# Altium PCB CAN_24bit_airspeed.PcbDoc
Units mm, origin at the board's own origin, x right, y up, seen from the top; angles counter-clockwise.
Board outline 38.41 x 12.98 mm, 4 copper layers (Component Side, Signal Layer Top, Signal Layer Bottom, Solder Side), stack 1.581 mm thick; 31 components, 33 nets, 144 pads, 54 vias.
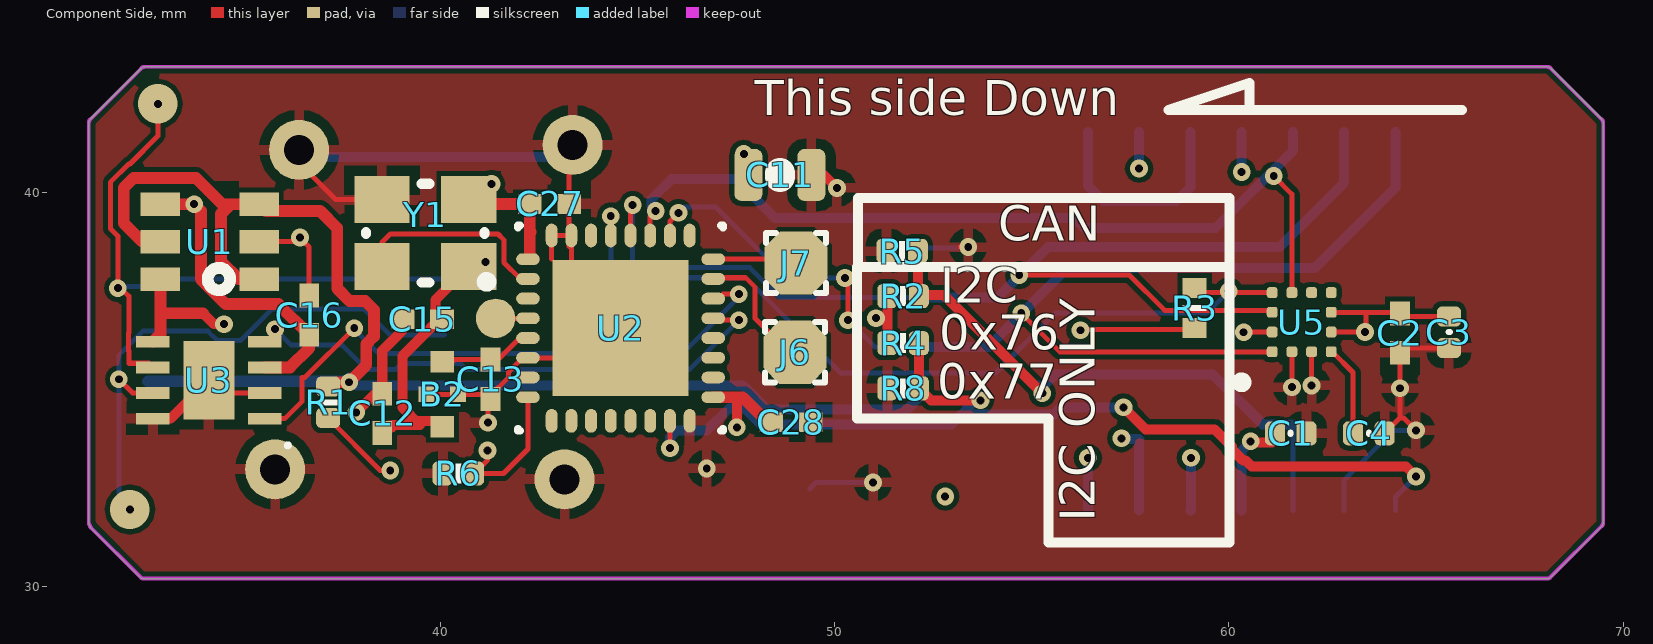
[diagram p0: Component Side view]
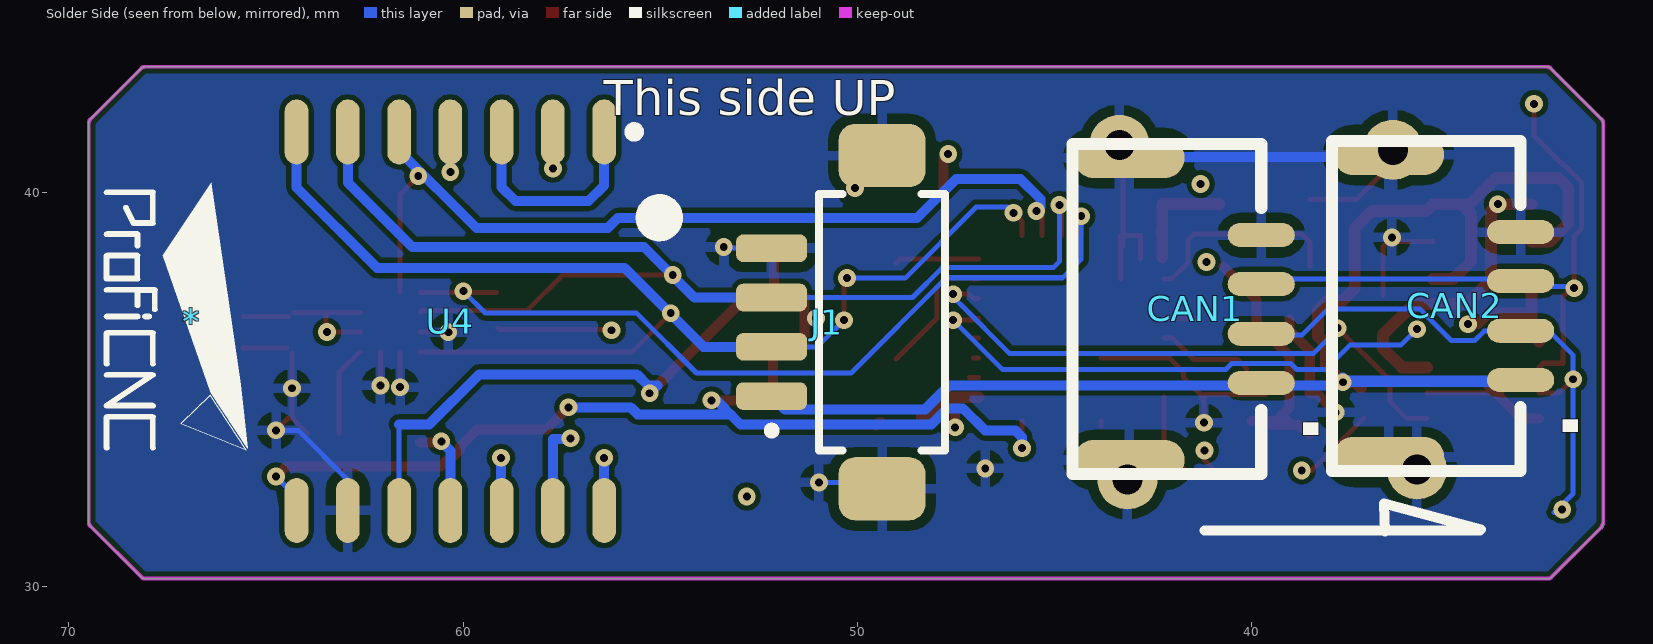
[diagram p1: Solder Side view, seen from below]
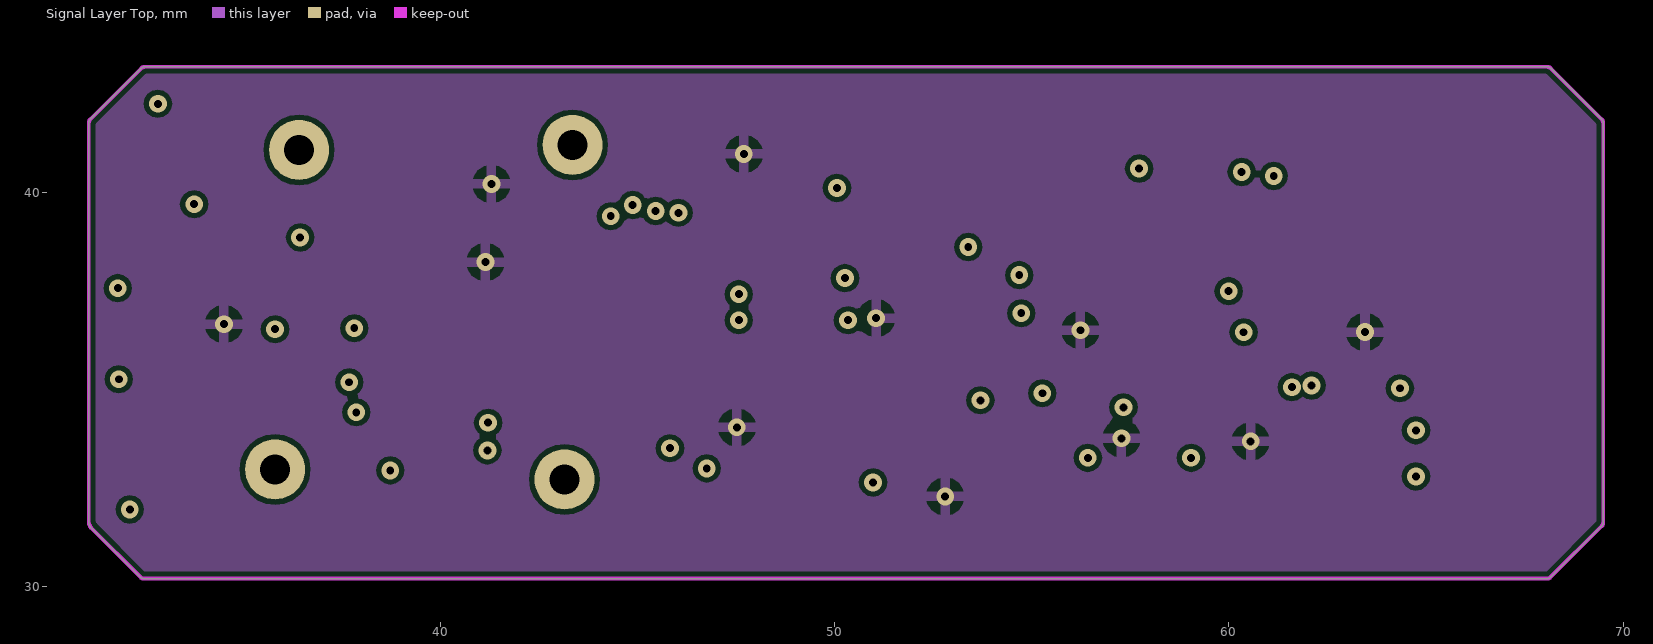
[diagram p2: Signal Layer Top]
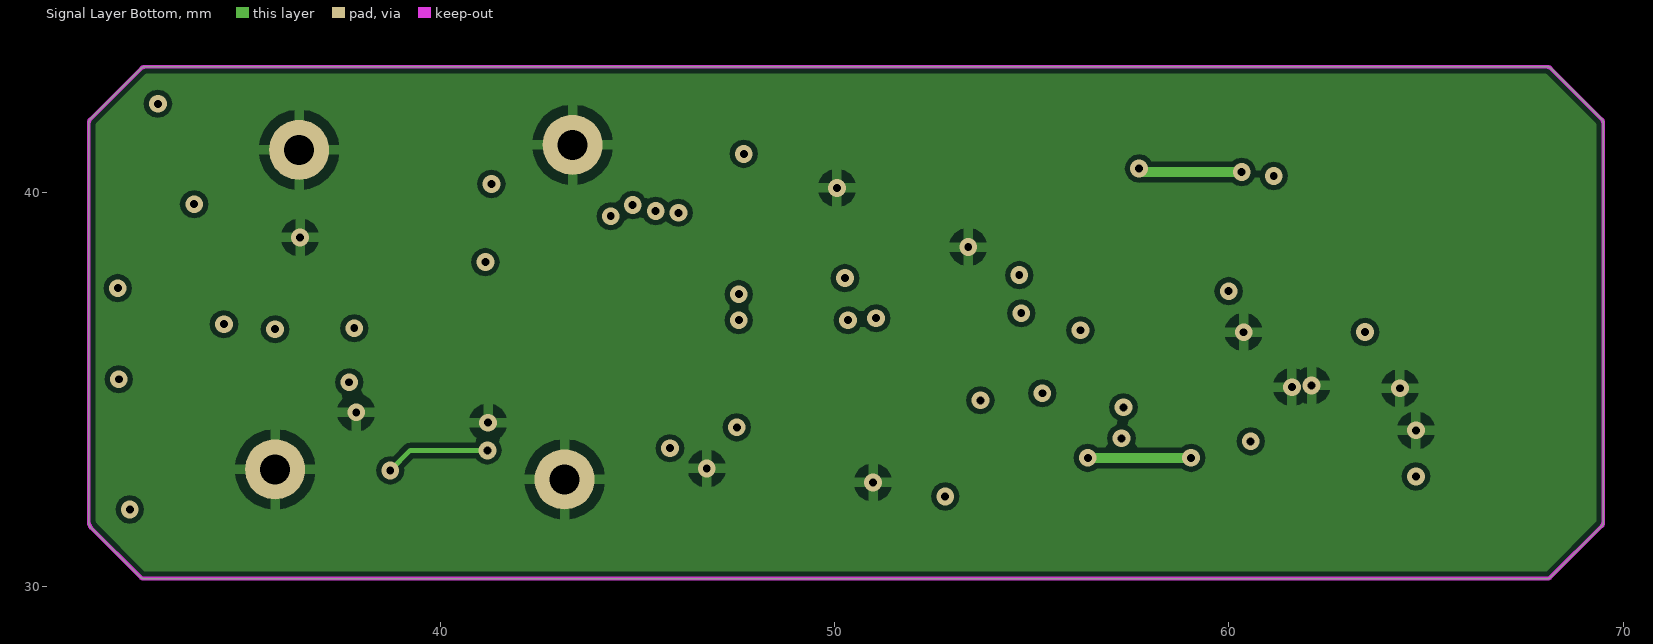
[diagram p3: Signal Layer Bottom]
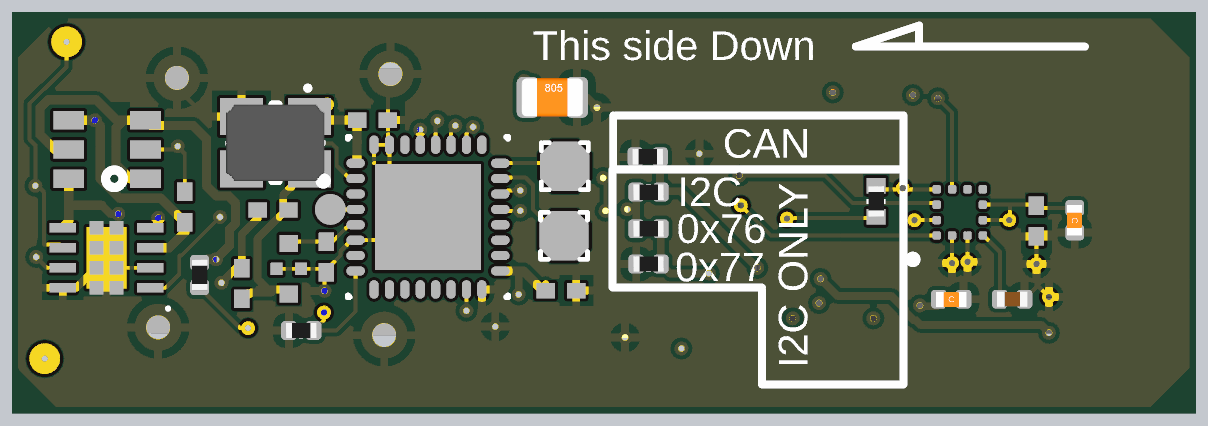
[diagram p4: 3D render of the assembled board from above, using the file's embedded part models]
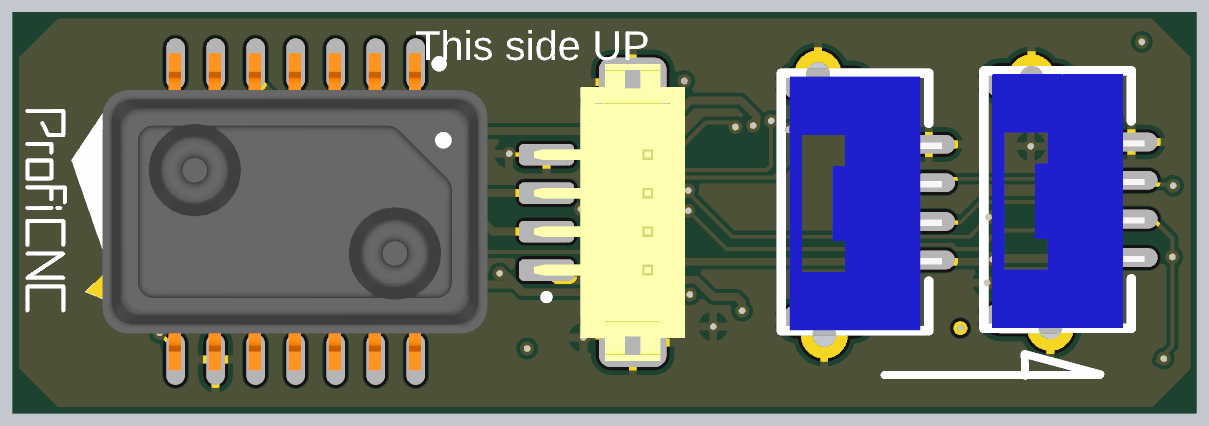
[diagram p5: 3D render of the assembled board from below, using the file's embedded part models]

## Layer stack, top to bottom
Component Side: signal copper 0.0711
Dielectric: prepreg 0.2311, Dk 4.2
Signal Layer Top: signal copper 0.0356
Dielectric: core 0.905, FR-4, Dk 4.2
Signal Layer Bottom: signal copper 0.0356
Dielectric: prepreg 0.2311, Dk 4.2
Solder Side: signal copper 0.0711

## Board outline
31.152,31.482 cw(c31.242,31.572) 31.118,31.542 cw(c31.217,31.623) 31.089,31.623 31.089,41.758 cw(c31.217,41.758) 31.127,41.848 32.422,43.143 32.421,43.143 cw(c32.512,43.053) 32.512,43.18 68.072,43.18 cw(c68.072,43.053) 68.163,43.143 68.162,43.143 69.457,41.848 cw(c69.367,41.758) 69.495,41.758 69.495,31.623 cw(c69.367,31.623) 69.457,31.532 69.457,31.533 68.162,30.238 68.163,30.238 cw(c68.072,30.328) 68.072,30.2 32.487,30.2 cw(c32.487,30.328) 32.396,30.238 32.397,30.238

## Design rules (kind name [scope] priority, off if disabled: settings)
Clearance [All] p1: gap=0.127
ComponentClearance E22-6 [HasFootprint('ProfiCNC_medium')  or HasFootprint('E22-6')] p1: gap=0 collisioncheckmode=3 verticalgap=0 showdistances=FALSE
ComponentClearance [All] p2: gap=0.254 collisioncheckmode=3 verticalgap=0.254 showdistances=FALSE
NetAntennae current_sense [InNet('SERVO_RAIL_SUP')] p1: netantennaetolerance=30
NetAntennae [All] p2: netantennaetolerance=0
PolygonConnect DIRECT [(HasFootprint('MOTOR_PAD') OR HasFootprint('CAPC5750L') OR HasFootprint('Q5B') OR HasFootprint('BAT_PAD')OR HasFootprint('4RESC5125X09N')OR HasFootprint('E22-6'))] p1: connectstyle=Direct reliefconductorwidth=0.254 reliefentries=4 polygonreliefangle="90 Angle" airgapwidth=0.254
PolygonConnect [All] p2: connectstyle=Relief reliefconductorwidth=0.254 reliefentries=4 polygonreliefangle="90 Angle" airgapwidth=0.254
RoutingVias [All] p1: holewidth=0.3 width=0.45 viastyle="Through Hole" minholewidth=0.2 minwidth=0.45 maxholewidth=0.711 maxwidth=1.27
ShortCircuit shunt [HasFootprint('4RESC5125X09N') vs InNetClass('All Nets')] p1: allowed=TRUE
ShortCircuit PCB_RESIST [InNet('SERVO_RAIL_SUP') vs InNet('SERVO_RAIL')] p2: allowed=TRUE
ShortCircuit [All] p3: allowed=FALSE
SolderMaskExpansion [All] p1: expansion=0.102
Width [All] p1: maxlimit=2 minlimit=0.127 preferedwidth=0.254
25 further rules are at their usual default settings.

## Components (designator, comment, footprint, x,y, rotation, side; value= is the part's Value field where it differs from the comment)
* "ProfiCNC_LOGO" PROFICNC_MEDIUM 66.878,36.728 r270 bottom
B2 "Filter" NFM18CC 40.056,34.874 r90 top
C1 "CAP" C0402#1 61.57,33.884 r0 top
C2 "Cap" CAPC1005L 64.338,36.424 r270 top (schematic designator C27)
C3 "0u1" C0402#2 65.583,36.449 r270 top (schematic designator C1)
C4 "0u1" C0402#2 63.551,33.884 r0 top
C11 "CAP" C0805 48.616,40.437 r0 top
C12 "CAP CER 10000PF 50V X7R 0402" CAPC1005L 38.532,34.392 r270 top
C13 "CAP CER 10000PF 50V X7R 0402" CAPC1005L 41.275,35.255 r90 top
C15 "CAP CER 10000PF 50V X7R 0402" CAPC1005L 39.548,36.779 r0 top
C16 "Cap" CAPC1005L 36.678,36.881 r270 top
C27 "Cap" CAPC1005L 42.774,39.7 r0 top
C28 "CAP CER 10000PF 50V X7R 0402" CAPC1005L 48.895,34.163 r180 top
CAN1 "BM04B-GHS-TBT" BM04-GHS-TBT 45.212,37.033 r90 bottom
CAN2 "BM04B-GHS-TBT" BM04-GHS-TBT 38.633,37.109 r90 bottom
J1 "HDR_TAB_1x4" DF13C-4P-1.25V 49.378,36.703 r270 bottom
J6 "1.6mm Pad / 0.9mm Hole" "1.6mm Pad / 0.9mm Hole" 48.997,35.941 r0 top
J7 "1.6mm Pad / 0.9mm Hole" "1.6mm Pad / 0.9mm Hole" 49.022,38.202 r0 top
R1 "RES" R0402#1 37.16,34.671 r270 top
R2 "RES" R0402#1 51.74,37.363 r0 top
R3 "RES" R0402#2 59.131,37.059 r90 top
R4 "RES" R0402#1 51.74,36.17 r0 top
R5 "RES" R0402#1 51.714,38.506 r180 top
R6 "RES" R0402#1 40.462,32.868 r180 top
R8 "RES" R0402#1 51.74,35.027 r180 top
U1 "MIC5211" SOT23-6 34.138,38.811 r180 top
U2 "IC MCU M4 64KB FLASH 32UFQFPN" QFN50P500X500X60-32L 44.577,36.551 r0 top
U3 "CAN" SON65P300X100_HS-9N 34.138,35.23 r180 top
U4 "MS5525DSO-DP" MS5525DSO 60.325,36.728 r270 bottom
U5 "LIS3MDL" LIS3MDL 61.849,36.703 r90 top
Y1 "Oscillator" CS325 39.624,38.964 r180 top

## Footprints (in the part's own frame and the unit in brackets; to place one, negate y for a bottom-side part, rotate by r counter-clockwise, add the part's x,y. Pads: shape width x height; smd on the part's side, far side on the other; paste and mask are expansions set on the pad)
"1.6mm Pad / 0.9mm Hole" [mil]
  oct 63x63 smd: 1(0,0)
  silkscreen extent -30,-30 30,30
BM04-GHS-TBT [mil] "BM04-GHS-TBT"
  rrect100% 24x67 smd: 1(-73.82,-214.57) 2(-24.61,-214.57) 3(25,-214.57) 4(74,-214.57)
  rrect100% 40x111 smd: GND(-150.59,-82.68) GND(151,-82.68)
  silkscreen extent -164,-215 165,-26, body extent -164,-231 161,-37, height 168
C0402#1 [mil]
  rrect50% 20x24 smd mask+0: 1(-15.75,0) 2(15.75,0)
  silkscreen extent 0,0 0,1, body extent -20,-10 20,9, height 19
C0402#2 [mil]
  rrect50% 20x24 smd mask+0: P$1(-15.75,0) P$2(15.75,0)
  silkscreen extent 0,0 0,1, body extent -20,-10 20,9, height 19
C0805 [mil]
  rrect50% 28x52 smd mask+0: 1(-31.5,0) 2(31.5,0)
  silkscreen extent 0,-2 0,2, body extent -39,-25 39,25, height 31
CAPC1005L [mm] "Chip Capacitor, Body 1.0x0.5mm, IPC High Density"
  rect 0.6x0.5 smd: 1(-0.5,0) 2(0.5,0)
  body extent -0.55,-0.3 0.55,0.3, height 0.6
CS325 [mm] "3.2mm x 2.5mm Oscillator"
  rect 1.4x1.2 smd: 1(-1.1,-0.85) 2(1.1,-0.85) 3(1.1,0.85) 4(-1.1,0.85)
  round 0.3 on Top Overlay: ""(-1.05,-1.775)
  silkscreen extent -1.5,-1.25 1.5,1.25, body extent -1.6,-1.24 1.6,1.24, height 0.99
DF13C-4P-1.25V [mm]
  rrect50% 0.7x1.8 smd: 1(1.875,-2.8) 2(0.625,-2.8) 3(-0.625,-2.8) 4(-1.875,-2.8)
  rrect50% 1.6x2.2 smd: tab(-4.225,0) tab(4.225,0)
  silkscreen extent -3.25,-2.9 3.25,1.6, body extent -4.82,-3.2 4.83,1.7, height 4.8
LIS3MDL [mm] "VFLGA-12"
  rrect50% 0.275x0.275 smd: 1(-0.75,0.75) 2(-0.75,0.25) 3(-0.75,-0.25) 4(-0.75,-0.75) 5(-0.25,-0.75) 6(0.25,-0.75) 7(0.75,-0.75) 8(0.75,-0.25) 9(0.75,0.25) 10(0.75,0.75) 11(0.25,0.75) 12(-0.25,0.75)
  silkscreen extent -1.65,1.4 -1.4,1.65, body extent -1.07,-1.07 1.07,1.07, height 0.79
MS5525DSO [mm] "MS5525DSO Differential preassure sensor"
  oval 1.65x0.6 smd: 1(-4.8,3.9) 2(-4.8,2.6) 3(-4.8,1.3) 4(-4.8,0) 5(-4.8,-1.3) 6(-4.8,-2.6) 7(-4.8,-3.9) 8(4.8,-3.9) 9(4.8,-2.6) 10(4.8,-1.3) 11(4.8,0) 12(4.8,1.3) 13(4.8,2.6) 14(4.8,3.9)
  silkscreen extent -4.92,4.53 -2.33,5.6, body extent -5.14,-6.28 5.16,6.22, height 9.7
NFM18CC [mm] "Chip Capacitor, 3-Leads, Body 1.6x0.8mm"
  rect 0.55x0.6 smd: 1(-0.825,0) 3(0.825,0)
  rect 0.4x0.4 smd: 2(0,0.4) 2(0,-0.4)
  body extent -0.85,-0.45 0.85,0.45, height 0.7
PROFICNC_MEDIUM [mm] "ProfiCNC_medium"
  silkscreen extent -3.5,-2.23 3.28,1.41
QFN50P500X500X60-32L [mm] "QFN, 32-Leads, Body 5.2x5.2mm (max), Pitch 0.50mm, IPC High Density"
  oval 0.6x0.3 smd: 1(-2.35,1.75) 2(-2.35,1.25) 3(-2.35,0.75) 4(-2.35,0.25) 5(-2.35,-0.25) 6(-2.35,-0.75) 7(-2.35,-1.25) 8(-2.35,-1.75) 17(2.35,-1.75) 18(2.35,-1.25) 19(2.35,-0.75) 20(2.35,-0.25) 21(2.35,0.25) 22(2.35,0.75) 23(2.35,1.25) 24(2.35,1.75)
  oval 0.3x0.6 smd: 9(-1.75,-2.35) 10(-1.25,-2.35) 11(-0.75,-2.35) 12(-0.25,-2.35) 13(0.25,-2.35) 14(0.75,-2.35) 15(1.25,-2.35) 16(1.75,-2.35) 25(1.75,2.35) 26(1.25,2.35) 27(0.75,2.35) 28(0.25,2.35) 29(-0.25,2.35) 30(-0.75,2.35) 31(-1.25,2.35) 32(-1.75,2.35)
  rect 3.45x3.45 smd: 33(0,0)
  silkscreen extent -3.52,-2.6 2.6,2.6, body extent -2.58,-2.57 2.57,2.58, height 0.6
R0402#1 [mil]
  rrect50% 20x24 smd mask+0: 1(-15.75,0) 2(15.75,0)
  silkscreen extent -3,-10 3,10, body extent -20,-10 20,10, height 12
R0402#2 [mil]
  rect 20x24 smd: 1(-19.68,0) 2(20,0)
  silkscreen extent -3,-12 3,12, body extent -20,-10 20,10, height 12
SON65P300X100_HS-9N [mm] "SON, 8-Leads, Body 3.00x3.00mm, Pitch 0.65mm, Thermal Pad 2.40x1.59mm, IPC Medium Density"
  rect 0.85x0.3 smd: 1(-1.42,0.975) 2(-1.42,0.325) 3(-1.42,-0.325) 4(-1.42,-0.975) 5(1.42,-0.975) 6(1.42,-0.325) 7(1.42,0.325) 8(1.42,0.975)
  rect 1.3x2 smd paste-0.795: 2(0,0)
  silkscreen extent -2.05,1.6 -1.95,1.7, body extent -1.55,-1.55 1.55,1.55, height 1
SOT23-6 [mm]
  rect 1x0.6 smd: 1(-1.27,1.016) 2(-1.27,0.066) 3(-1.27,-0.884) 4(1.23,-0.884) 5(1.23,0.066) 6(1.23,1.016)
  Component Side pour cut-out: -0.77,1.616 -0.77,-1.484 0.73,-1.484 0.73,1.616
  silkscreen extent -0.54,0.73 0.03,1.3

## Part data
B2: library part NFM18CC222R1C3, "EMIFIL (Capacitor type) Single Circuit Type for Signal Lines"
C1: library part C01050, "CAP CER 0.1UF 16V X7R 0402"
C2 C16 C27: "CAP CER 1UF 6.3V X5R 0402"
C3 C4: library part CAP0402, "CAP CER 0.1UF 16V Y5V 0402"
C11: library part C01690, "CAP CER 22UF 6.3V X5R 0805"
C12 C13 C15 C28: library part Cap
J1: library part J00015, "CONN HEADER 4POS 1.25MM SMD GOLD"
J6 J7: library part "Connector 1x01"
R1: library part R00142, "RES SMD 10K OHM 1% 1/16W 0402"
R2 R3 R4 R5 R8: library part R00094, "RES SMD 0R 1% 1/16W 0402"
R6: library part R00094, "RES SMD 1K OHM 1% 1/16W 0402"
U2: library part STM32F302K8U6, "72 MHz Cortex-M4F MCU with 16 KB RAM, 64 KB flash"
Y1: library part ASE-12.000MHZ, "3.3V 8MHz XO Oscillator"

## Free pads (board coordinates)
  round 1.524 hole 0.762: 0(36.424,41.072) 1(35.814,32.969) 2(43.155,32.715) 3(43.358,41.199)
  round 1 smd: 4(41.406,36.801)

## Via types
v1: diameter 0.45, hole 0.2, Component Side to Solder Side, tented both sides, 41 vias
v2: diameter 0.45, hole 0.2, Component Side to Solder Side, 11 vias
v3: diameter 1/0.45/0.45/0.45 (per signal layer), hole 0.2, Component Side to Solder Side, tented bottom, 2 vias

## Nets (pads, with @x,y where several pads share a name; then routed paths per layer and width w, separated by ;. In a path a pad name is that pad's centre, name@x,y a point inside that pad or via, vN(x,y) a via of type N, cw(c..) or ccw(c..) an arc to the next point about the centre after c; other vN are vias at no path point)
3V3_MCU: B2.1 C1.1 C2.1 C3.P$1 C11.1 C12.2 C15.2 C27.1 C28.2 R2.1 R3.1 R4.1 U1.6 U2.1 U2.17 U3.5 U4.11 U4.13 U5.5 U5.6 Y1.1 Y1.4 | length 30
  Component Side w0.127: v2(56.236,36.5) 56.252,36.516 59.089,36.516 R3.1 ; U5.5 v2(63.453,36.453) ; U5.6 63.475,36.953 ; v2@63.475,36.474 63.475,36.953 ; C2.1@64.309,36.953 63.475,36.953 ; C2.1@64.413,36.849 C3.P$1
  Component Side w0.254: 33.985,36.932 34.265,36.652 v1(34.519,36.652) ; C12.2@38.768,34.061 38.805,34.098 39.486,34.098 39.04,34.544 39.04,35.839 39.878,36.678 39.878,37.268 Y1.4 ; 39.085,34.202 B2.1@40.005,34.202 ; v1(47.523,34.036) 47.523,34.651 47.673,34.801 ; v1(47.701,40.97) 47.816,40.856 C11.1 C11.1@47.816,40.043 ; C28.2 C28.2@48.395,34.374 ; v1(51.054,36.805) 51.34,36.805 ; R4.1 51.34,36.805 ; R2.1 51.34,36.805 ; v1(60.554,33.68) 60.579,33.655 C1.1@61.093,33.655
  Component Side w0.3: U3.5 32.908,36.395 32.908,36.932 ; U1.6 32.908,36.932 ; 33.985,36.932 32.908,36.932 ; C12.2 38.702,34.061 C12.2@38.768,34.061 ; Y1.1@40.837,39.7 C27.1 42.274,39.006 42.291,38.989 42.274,38.989 U2.1@42.274,38.347 ; U2.17 47.673,34.801 C28.2@48.293,34.18
  Solder Side w0.254: v1(57.277,33.757) 57.293,33.74 57.725,33.74 U4.13 ; U4.11 60.325,33.452 v1(60.554,33.68)
  Solder Side w0.3: v1(41.148,38.227) v1@41.148,38.278
  other v1: 52.807,32.283 41.3,40.208
3V3A: B2.3 C13.2 U2.5 | length 2.4
  Component Side w0.127: B2.3@40.132,35.521 40.366,35.755 C13.2 41.47,35.755 42.016,36.301 U2.5
5V_MCU: C16.2 U1.4 U3.3 | length 7.8
  Component Side w0.3: U1.4 v1(33.762,39.695) 33.934,39.522 33.934,37.795 34.569,37.16 35.898,37.16 C16.2 36.678,36.043 36.19,35.555 U3.3
CAN_POWER_IN: CAN1.1 CAN2.1 J1.1 R1.1 U1.1 U1.3 U1.5 | length 37
  Component Side w0.3: U1.5 32.451,38.745 31.979,39.218 31.979,40.108 32.232,40.361 33.806,40.361 34.472,39.695 U1.3 ; U1.1 34.9,37.795 34.442,38.252 34.442,39.446 34.691,39.695 U1.3 ; R1.1@37.236,35.046 37.37,35.179 v1(37.694,35.179) 38.128,35.613 38.128,36.148 38.323,36.343 38.323,36.759 ; 38.323,36.703 38.323,37.014 38.1,37.237 37.709,37.237 37.389,37.557 37.389,39.091 36.957,39.522 35.58,39.522 U1.3
  Solder Side w0.254: v1@37.694,35.281 37.871,35.103 47.673,35.103 48.282,34.493 51.843,34.493 J1.1
  Solder Side w0.3: CAN2.1@32.588,35.204 37.694,35.204 v1@37.694,35.281
CAN_POWER_SENSE: R1.2 R6.1 U2.8 | length 8.5
  Component Side w0.127: R1.2 37.16,34.265 38.481,32.944 v2(38.735,32.944) ; v2(41.199,33.452) 41.199,33.204 R6.1 41.605,32.868 42.227,33.489 U2.8
  Signal Layer Bottom w0.127: v2(38.735,32.944) 39.243,33.452 v2(41.199,33.452)
CAN_RX: U2.21 U3.4 | length 13.6
  Component Side w0.127: U2.21 47.059,36.801 47.012,36.754 v1(47.574,36.754)
  Solder Side w0.127: v1(35.814,36.525) 36.22,36.119 37.516,36.119 38.125,35.509 38.866,35.509 39.011,35.653 40.513,35.653 40.658,35.509 46.33,35.509 v1(47.574,36.754)
CAN_TX: U2.22 U3.1 | length 14.9
  Component Side w0.127: U3.1 36.058,34.255 36.5,34.696 36.5,35.299 36.569,35.299 v1(37.821,36.551) ; U2.22 47.059,37.301 47.172,37.414 v1(47.574,37.414)
  Solder Side w0.127: v1@37.795,36.551 38.433,35.913 46.146,35.913 ; 46.148,35.916 47.402,37.169 47.406,37.169 v1@47.574,37.338
CANH: CAN1.2 CAN2.2 U3.7 | length 14.4
  Component Side w0.127: v1(31.852,35.255) 32.202,34.905 U3.7
  Solder Side w0.127: v3@32.334,31.877 31.852,32.36 v1(31.852,35.255) 31.852,35.865 32.461,36.474 34.109,36.474 34.346,36.237 34.941,36.237 35.398,36.694 35.398,36.697 35.743,37.042 38.065,37.042 38.735,36.373 CAN1.2@40.107,36.373
  other v3: 32.131,31.953
CANL: CAN1.3 CAN2.3 U3.6 | length 16.6
  Component Side w0.127: U3.6 32.611,35.662 32.106,35.662 32.106,35.972 32.102,35.976 32.102,36.434 32.106,36.437 32.106,37.363 31.902,37.567 v1(31.826,37.567) 31.826,38.888 31.638,39.077 31.638,40.249 32.106,40.716 32.136,40.716 32.842,41.423 v3@32.842,42.393
  Solder Side w0.127: v1@31.826,37.607 33.133,37.607 33.133,37.654 33.274,37.795 CAN1.3@40.183,37.795
  other v3: 32.842,42.24
CLK: U2.2 Y1.3 | length 5.2
  Component Side w0.127: Y1.3 38.524,38.727 38.735,38.938 41.469,38.938 41.615,38.793 41.615,38.218 42.032,37.801 U2.2
GND_MCU: B2.2 C1.2 C2.2 C3.P$2 C4.P$2 C11.2 C12.1 C13.1 C15.1 C16.1 C27.2 C28.1 CAN1.4 CAN1.GND CAN2.4 CAN2.GND J1.4 J1.tab pad.0 pad.1 pad.2 pad.3 R5.2 R6.2 R8.2 U1.2 U2.6 U2.16 U2.31 U2.32 U2.33 U3.2 U3.8 U4.9 U5.2 U5.3 U5.12 Y1.2 | length 41.2
  Component Side w0.127: U3.2@33.674,34.905 33.813,34.905 U3.2@35.558,34.905 ; U1.2 36.51,38.745 36.525,38.76 36.678,38.608 C16.1 ; pad.0@36.449,40.716 37.352,39.814 Y1.2 ; B2.2@39.656,34.874 41.216,34.874 v1(41.216,34.155) ; C13.1 41.275,34.849 41.737,35.31 41.737,35.442 42.095,35.801 U2.6 U2.33@43.827,35.801 ; 42.827,38.301 U2.32 U2.31@43.274,38.901 ; U2.31@43.274,38.623 U2.31@43.274,38.901 ; pad.3@43.274,40.623 C27.2 U2.31@43.274,38.901 ; U2.33@43.327,37.801 U2.31 U2.31@43.274,38.901 ; v1@53.188,38.608 v1(53.391,38.608) ; v2@60.38,36.453 U5.12 ; v2(61.599,35.056) U5.2 ; v2(62.099,35.099) U5.3 ; C4.P$2 64.338,34.271 ; C2.2 v2(64.338,35.027) 64.338,34.271 ; C2.2@64.464,36.049 C3.P$2 ; v2(64.745,33.96) 64.433,34.271 64.338,34.271
  Component Side w0.254: U3.8 33.163,34.255 33.813,34.905 U3.2@34.138,35.23 ; v1(37.871,34.417) 38.346,34.892 C12.1 38.532,35.981 39.04,36.489 C15.1@39.04,36.779 ; C28.1 49.454,34.163 C28.1@49.53,34.087 ; C11.2 49.733,40.437 v1(50.063,40.107) ; v2(60.376,36.449) v2@60.38,36.453
  Solder Side w0.127: v1@36.449,38.837 v1(36.449,38.852) ; v1@46.727,32.96 v1(46.761,32.995) ; J1.tab@49.378,32.478 49.539,32.639 v1(50.978,32.639) ; v1@50.039,40.083 v1(50.063,40.107) ; J1.4 53.361,38.578 v1(53.391,38.608) ; U4.9 62.925,32.699 64.186,33.96 v2(64.745,33.96)
  Solder Side w0.254: pad.0@36.627,40.894 pad.3@43.002,40.894
I_A: U2.7
MS_PS: R2.2 R5.1 U4.10 | length 15
  Component Side w0.254: R5.1 52.114,37.389 52.781,37.389 v1(55.27,34.9)
  Solder Side w0.127: U4.10 61.625,34.112
  Solder Side w0.254: v1(55.27,34.9) 55.073,35.097 55.315,35.097 55.601,35.382 59.588,35.382 60.858,34.112 61.625,34.112
NetC4_P$1: C4.P$1 U5.4 | length 2.3
  Component Side w0.127: U5.4 62.624,35.953 63.151,35.427 C4.P$1
NetU4_1: U4.1 U4.3 | length 5.7
  Solder Side w0.254: U4.1 56.425,40.171 56.82,39.776 58.674,39.776 59.025,40.127 U4.3
NetU4_2: U4.2 U4.4 | length 4.6
  Component Side w0.254: v1@60.274,40.462 v1(60.325,40.513)
  Signal Layer Bottom w0.254: v1@57.709,40.513 v1(60.325,40.513)
  Solder Side w0.254: v1(57.725,40.598) U4.2 ; v1(60.325,40.513) U4.4
NetU4_12: U4.12 U4.14 | length 5.3
  Signal Layer Bottom w0.254: v1(56.425,33.262) v1(59.041,33.262)
  Solder Side w0.254: U4.14 v1(56.425,33.262) ; U4.12 59.041,31.945 v1(59.041,33.262)
NFAULT: U2.3
PWM_A: U2.18 | length 0.2
  Component Side w0.127: U2.18 U2.18@47.162,35.301
PWM_B: U2.19 | length 0.1
  Component Side w0.127: U2.19 U2.19@47.059,35.801
PWM_C: U2.20 | length 0.1
  Component Side w0.127: U2.20 U2.20@47.059,36.301
R\S\T\: pad.4 U2.4 | length 0.8
  Component Side w0.127: pad.4 U2.4
SERVO_RAIL_I_SENSE: U2.9
SERVO_RAIL_V_SENSE: U2.10
SPI3_CS: R4.2 R8.1 U2.15 U4.8 | length 26.1
  Component Side w0.127: v1(45.827,33.508) U2.15
  Component Side w0.254: R8.1@52.14,34.995 R4.2 ; R8.1 52.445,34.722 v1(53.7,34.722) ; v1(57.328,34.544) 57.887,33.985 59.639,33.985 60.075,33.55 60.075,33.482 60.355,33.201 60.423,33.201 60.579,33.045 64.491,33.045 v1(64.745,32.791)
  Solder Side w0.127: U4.8 64.225,32.272 v1(64.745,32.791)
  Solder Side w0.254: v1(45.827,33.508) 45.827,33.787 45.999,33.96 46.77,33.96 47.325,34.515 47.722,34.515 48.125,34.112 52.968,34.112 53.08,34.224 ; v1(53.7,34.722) 53.578,34.722 53.08,34.224 ; v1(57.328,34.544) 55.753,34.544 55.575,34.366 53.222,34.366 53.08,34.224
SPI3_CS2: R3.2 U2.29 U5.10 | length 21.2
  Component Side w0.127: U2.29 v1(44.327,39.391) ; R3.2@59.157,37.453 U5.10
  Solder Side w0.127: v1(44.327,39.391) 44.327,38.299 44.796,37.83 47.746,37.83 50.162,35.415 54.084,35.415 55.601,36.932 59.436,36.932 v2(59.995,37.49)
SPI3_MISO: U2.27 U4.5 U5.9 | length 22.5
  Component Side w0.127: U2.27 45.327,39.383 v1(45.466,39.522) ; v1(61.138,40.411) 61.599,39.95 U5.9
  Solder Side w0.254: v1(45.466,39.522) 45.361,39.628 45.361,39.824 45.872,40.335 47.498,40.335 48.489,39.345 56.078,39.345 56.332,39.091 59.665,39.091 61.625,41.051 U4.5
SPI3_MOSI: J1.3 U2.28 U4.6 U5.11 | length 30
  Component Side w0.127: U2.28 44.827,39.62 v1(44.882,39.675) ; v1(54.686,37.897) 57.48,37.897 58.374,37.003 61.049,37.003 U5.11
  Solder Side w0.127: v1(44.882,39.675) 44.882,38.236 45.034,38.084 47.852,38.084 48.607,37.328 J1.3
  Solder Side w0.254: J1.3 54.137,37.328 55.417,38.608 61.29,38.608 62.925,40.243 U4.6
SPI3_SCK: J1.2 U2.26 U4.7 U5.1 | length 30.8
  Component Side w0.127: U2.26 45.827,39.261 v1(46.043,39.477) ; v1(50.267,37.821) 50.343,37.744 v1(50.343,36.754) ; v2(54.737,36.932) 55.716,35.953 U5.1
  Solder Side w0.127: v1(46.043,39.477) 46.19,39.624 46.99,39.624 48.793,37.821 v1(50.267,37.821) ; v1(50.343,36.754) 51.019,36.078 J1.2
  Solder Side w0.254: J1.2 53.909,36.078 55.905,38.075 62.179,38.075 64.225,40.12 U4.7
SWCLK: J7.1 U2.24 | length 2.1
  Component Side w0.127: U2.24 48.923,38.301 J7.1
SWDIO: J6.1 U2.23 | length 3.6
  Component Side w0.127: U2.23@47.059,37.801 U2.23 46.956,37.83 47.746,37.83 47.99,37.586 47.99,36.795 J6.1@49.022,35.763
UBLED_CLK: U2.30
UBLED_MO: U2.11 | length 0.1
  Component Side w0.127: U2.11@43.827,34.069 U2.11
pads on no net: U2.12 U2.13 U2.14 U2.25 U5.7 U5.8 Y1.

## Polygon pours and split planes (outlines as drawn)
GND_MCU on Component Side "GND" (solid, remove dead copper, pour order 8): 28.27,46.152 72.009,46.152 72.009,23.851 72.847,23.012 71.349,24.511 27.483,24.511
GND_MCU on Solder Side "GND" (solid, remove dead copper, pour order 5): 28.27,46.152 72.009,46.152 72.009,23.851 72.847,23.012 71.349,24.511 27.483,24.511
3V3_MCU on Signal Layer Top "GND" (solid, remove dead copper, pour order 7): 28.219,46.863 71.958,46.863 71.958,24.562 72.796,23.724 71.298,25.222 27.432,25.222
GND_MCU on Signal Layer Bottom "GND" (solid, remove dead copper, pour order 6): 28.219,46.863 71.958,46.863 71.958,24.562 72.796,23.724 71.298,25.222 27.432,25.222

## Keep-outs
Keep-Out Layer:
  lines w0.1: 31.118,31.542 cw(c31.217,31.623) 31.089,31.623 31.089,41.758 cw(c31.217,41.758) 31.127,41.848 ; 31.118,31.542 ccw(c31.242,31.572) 31.152,31.482 32.397,30.238 ; 31.118,31.542 31.118,31.542 ; 31.127,41.848 32.422,43.143 ; 31.127,41.848 31.127,41.848 ; 32.396,30.238 ccw(c32.487,30.328) 32.487,30.2 68.072,30.2 ccw(c68.072,30.328) 68.163,30.238 ; 32.396,30.238 32.397,30.238 ; 32.421,43.143 cw(c32.512,43.053) 32.512,43.18 68.072,43.18 cw(c68.072,43.053) 68.163,43.143 ; 32.421,43.143 32.422,43.143 ; 68.162,30.238 68.163,30.238 ; 68.162,30.238 69.457,31.533 ; 68.162,43.143 69.457,41.848 ; 68.162,43.143 68.163,43.143 ; 69.457,31.532 ccw(c69.367,31.623) 69.495,31.623 69.495,41.758 ccw(c69.367,41.758) 69.457,41.848 ; 69.457,31.532 69.457,31.533 ; 69.457,41.848 69.457,41.848

## Silkscreen, mask and mechanical layers (free items; w line width, h text height)
Top Overlay:
  lines w0.254: 60.02,38.1 50.571,38.1 ; 65.913,42.088 58.471,42.088 ; 50.571,38.1 50.597,38.1 50.597,39.853 57.277,39.853 60.02,39.853 60.02,31.115 55.423,31.115 55.423,34.265 50.571,34.265 50.571,38.1 ; 58.471,42.088 60.528,42.088 60.528,42.774 58.471,42.088
  text "This side Down" at 47.981,41.656 h1.52
  text "CAN" at 54.153,38.481 h1.52
  text "I2C" at 52.68,36.906 h1.52
  text "0x76" at 52.654,35.712 h1.52
  text "0x77" at 52.603,34.468 h1.52
  text "I2C ONLY" at 56.896,31.648 h1.52 r90
Bottom Overlay:
  lines w0.254: 34.188,31.445 36.652,32.106 ; 34.214,31.42 41.199,31.42 ; 36.627,31.394 36.652,32.08
  text "This side UP" at 56.439,41.656 h1.52
Mechanical 1:
  lines w0.1: 31.118,31.542 cw(c31.217,31.623) 31.089,31.623 31.089,41.758 cw(c31.217,41.758) 31.127,41.848 ; 31.118,31.542 ccw(c31.242,31.572) 31.152,31.482 32.397,30.238 ; 31.118,31.542 31.118,31.542 ; 31.127,41.848 32.422,43.143 ; 31.127,41.848 31.127,41.848 ; 32.396,30.238 ccw(c32.487,30.328) 32.487,30.2 68.072,30.2 ccw(c68.072,30.328) 68.163,30.238 ; 32.396,30.238 32.397,30.238 ; 32.421,43.143 cw(c32.512,43.053) 32.512,43.18 68.072,43.18 cw(c68.072,43.053) 68.163,43.143 ; 32.421,43.143 32.422,43.143 ; 68.162,30.238 68.163,30.238 ; 68.162,30.238 69.457,31.533 ; 68.162,43.143 69.457,41.848 ; 68.162,43.143 68.163,43.143 ; 69.457,31.532 ccw(c69.367,31.623) 69.495,31.623 69.495,41.758 ccw(c69.367,41.758) 69.457,41.848 ; 69.457,31.532 69.457,31.533 ; 69.457,41.848 69.457,41.848